# Altium PCB Quadro.PcbDoc (part 1 of 2)
Units mm, origin at the board's own origin, x right, y up, seen from the top; angles counter-clockwise.
Board outline 388.52 x 333.5 mm, 2 copper layers (Top Layer, Bottom Layer); 70 components, 65 nets, 291 pads, 66 vias.
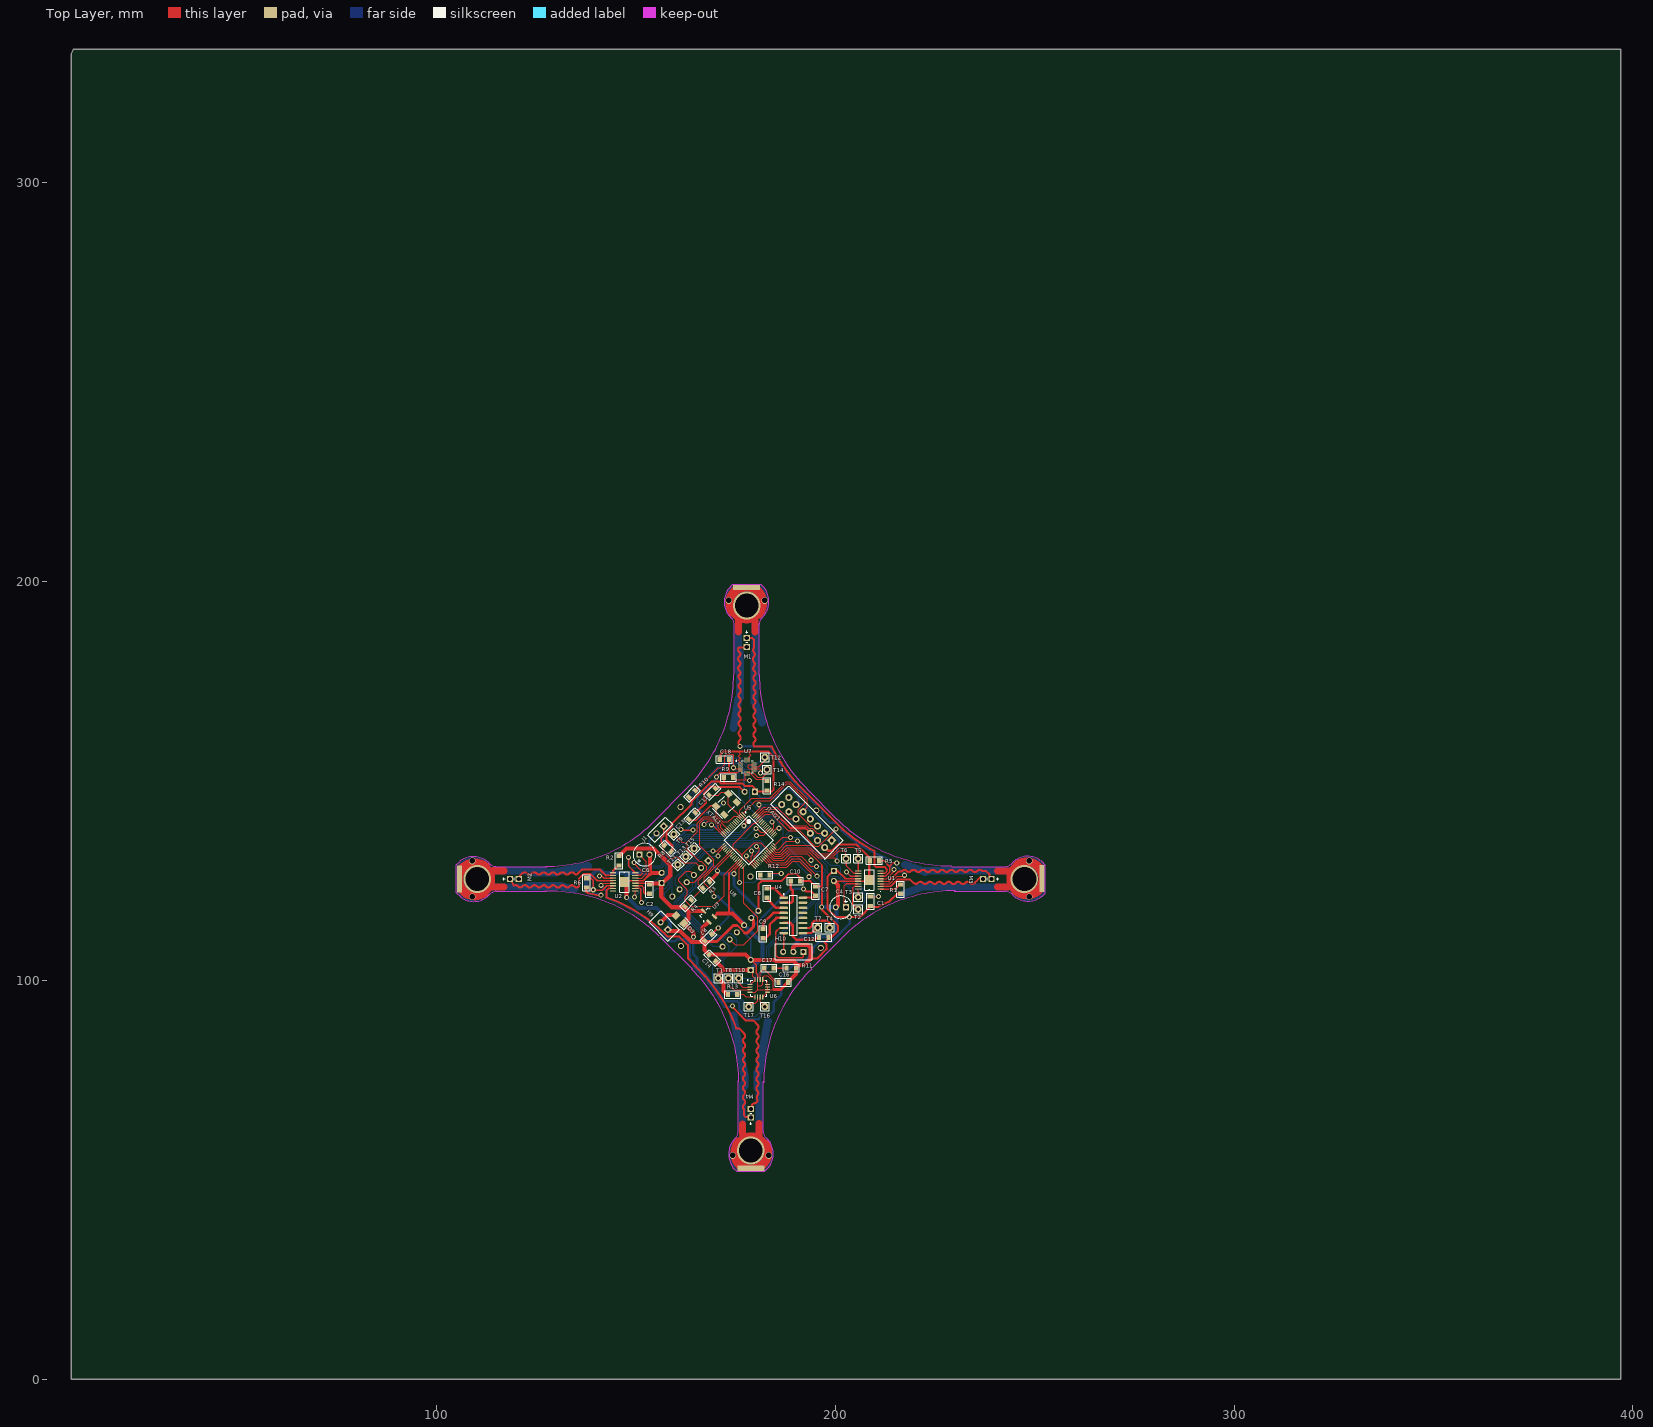
[diagram p0: Top Layer view]
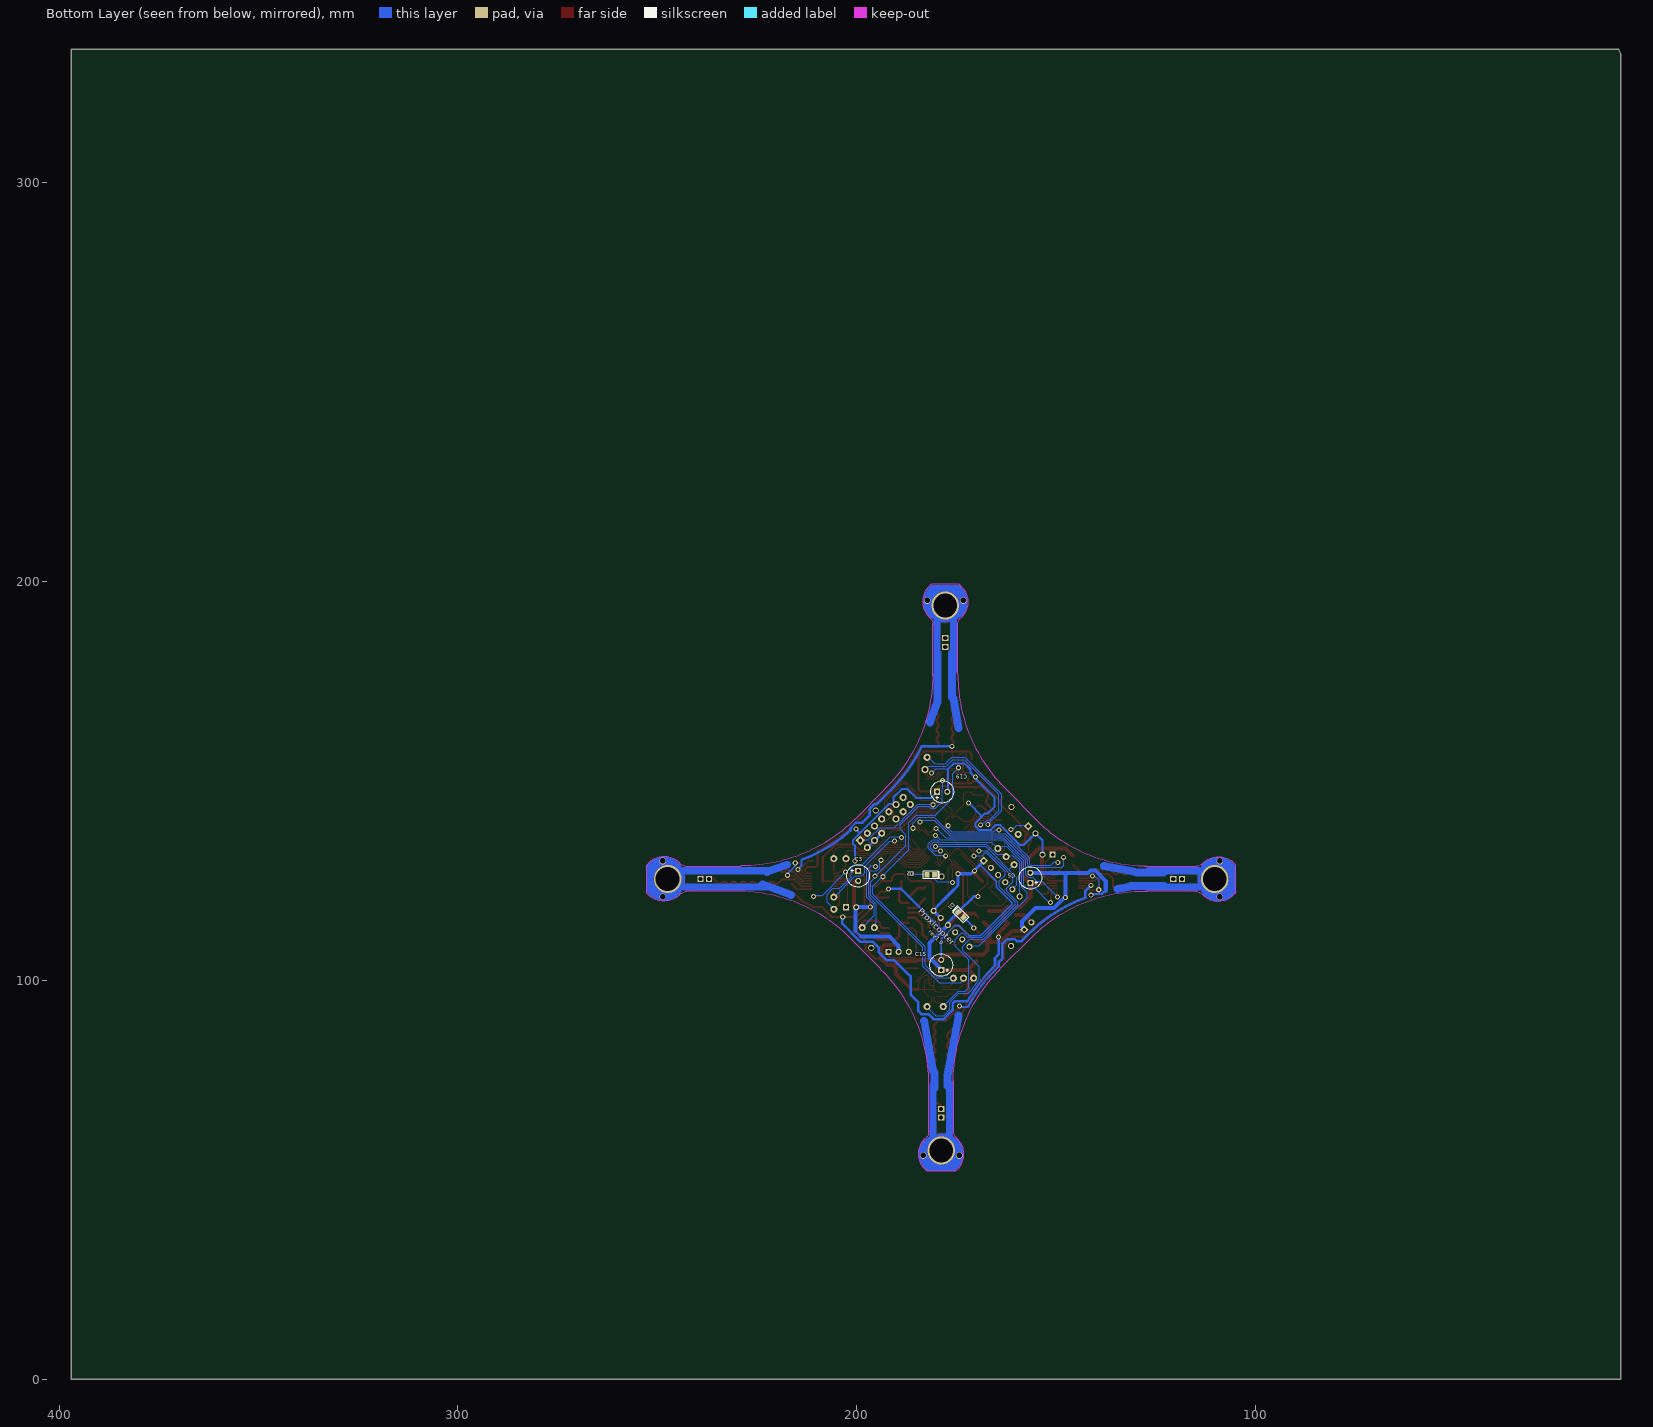
[diagram p1: Bottom Layer view, seen from below]

## Layer stack, top to bottom
Top Layer: signal copper 0.0356
Dielectric: dielectric 0.32, FR-4, Dk 4.8
Bottom Layer: signal copper 0.0356

## Board outline
8.992,333.502 396.951,333.502 396.951,0 8.433,0 8.433,332.384

## Design rules (kind name [scope] priority, off if disabled: settings)
Clearance [All] p1: gap=0.203
HoleSize [All] p1: absolutevalues=TRUE maxlimit=15.24 minlimit=0.025 maxpercent=80.000 minpercent=20.000
MinimumSolderMaskSliver [All] p1: minsoldermaskwidth=0.127
PolygonConnect [All] p1: connectstyle=Relief reliefconductorwidth=0.254 reliefentries=4 polygonreliefangle="90 Angle"
RoutingVias [All] p1: holewidth=0.711 width=1.27 viastyle="Through Hole" minholewidth=0.711 minwidth=1.27 maxholewidth=0.711 maxwidth=1.27
SilkToSilkClearance [All] p1: silktosilkclearance=0.203
SilkscreenOverComponentPads [All] p1: minsilkscreentomaskgap=0.254
SolderMaskExpansion [All] p1: expansion=0.051
Width [All] p1: maxlimit=4 minlimit=0.254 preferedwidth=0.254
24 further rules are at their usual default settings.

## Components (designator, comment, footprint, x,y, rotation, side; value= is the part's Value field where it differs from the comment)
C1 "" C0805 208.788,119.888 r90 top
C2 "" C0805 153.416,122.936 r270 top
C3 "10uF" CAP 199.644,127.508 r180 bottom
C4 "2.2uF" CAP 202.692,118.364 r270 top
C5 "10uF" CAP 156.464,124.46 r0 bottom
C6 "2.2uF" CAP 150.876,131.572 r90 top
C7 "" C0805 195.072,122.428 r90 top
C8 "" C0805 182.88,121.92 r90 top
C9 "" C0805 181.864,111.76 r90 top
C10 "" C0805 189.992,124.968 r180 top
C11 "" C0805 169.164,147.32 r225 top
C12 "" C0805 197.104,110.744 r0 top
C13 "" C0805 164.084,141.224 r225 top
C14 "" C0805 169.164,105.664 r135 top
C15 "10uF" CAP 178.816,102.616 r0 bottom
C16 "" C0805 186.944,99.568 r0 top
C17 "" C0805 183.388,103.124 r180 top
C18 "" C0805 172.212,155.448 r180 top
C19 "10uF" CAP 179.832,147.32 r90 bottom
D1 "DIODE1" LED0805 173.228,115.824 r45 bottom
D2 "DIODE1" LED0805 182.372,126.492 r180 bottom
D3 "DIODE" D1206 161.036,115.316 r135 top
H9 "HEADER_2X1" HDR2X1 157.988,112.776 r225 top
H10 "HEADER_3X1" HDR3X1 192.024,107.188 r270 top
J1 "JMP" DIODE 156.972,138.684 r315 top
JTAG1 "JTAG-USBTAP" USB-TAP 199.136,135.128 r135 top
M1 "Motor" GDC612 177.8,194.056 r0 top
M2 "Motor" GDC612 110.236,125.476 r90 top
M3 "Motor" GDC612 247.396,125.476 r270 top
M4 "Motor" GDC612 178.816,57.404 r180 top
R1 "" R0805 216.408,122.936 r270 top
R2 "" R0805 145.796,130.048 r90 top
R3 "" R0805 167.64,123.952 r225 top
R4 "" R0805 163.068,119.38 r225 top
R5 "" R0805 209.804,130.048 r0 top
R6 "" R0805 137.668,124.46 r90 top
R7 "" R0805 168.148,110.744 r225 top
R8 "" R0805 157.988,133.096 r315 top
R9 "" R0805 173.228,150.876 r180 top
R10 "" R0805 164.084,146.812 r225 top
R11 "" R0805 188.976,103.124 r0 top
R12 "" R0805 182.372,126.492 r180 top
R13 "" R0805 174.244,96.52 r180 top
R14 "" R0805 182.88,148.844 r270 top
T1 "TestPoint" HDR1X1 170.688,100.584 r0 top
T2 "TestPoint" HDR1X1 205.74,117.856 r270 top
T3 "TestPoint" HDR1X1 205.74,120.904 r90 top
T4 "TestPoint" HDR1X1 198.628,113.284 r0 top
T5 "TestPoint" HDR1X1 205.74,130.556 r0 top
T6 "TestPoint" HDR1X1 202.692,130.556 r90 top
T7 "TestPoint" HDR1X1 195.58,113.284 r0 top
T8 "TestPoint" HDR1X1 173.228,100.584 r0 top
T9 "TestPoint" HDR1X1 159.512,136.652 r45 top
T10 "TestPoint" HDR1X1 175.768,100.584 r90 top
T11 "TestPoint" HDR1X1 160.528,129.032 r135 top
T12 "TestPoint" HDR1X1 182.372,155.956 r90 top
T13 "TestPoint" HDR1X1 162.56,131.064 r225 top
T14 "TestPoint" HDR1X1 182.88,152.908 r90 top
T15 "TestPoint" HDR1X1 164.592,133.096 r135 top
T16 "TestPoint" HDR1X1 182.372,93.472 r90 top
T17 "TestPoint" HDR1X1 178.308,93.472 r90 top
U1 "DRV8833" R_PDSO_G16 211.328,122.936 r180 top
U2 "DRV8833" R_PDSO_G16 144.272,127 r0 top
U3 "MCP1700" SOT-23_M 167.627,116.741 r135 top
U4 "MAX3232CSE" NSO16_N 189.484,116.332 r0 top
U5 "MC56F8257" LQFP64 178.308,135.128 r315 top
U6 "L3G4200D" LGA16-A 180.848,98.044 r0 top
U7 "LIS3DH" LGA-16 177.927,153.594 r0 top
U8 "MRF24J40MA" MRF24J40MA 168.148,130.048 r315 top
XTAL1 "XTAL" OSC_SMD_CRYS 173.228,146.812 r225 top

## Footprints (in the part's own frame and the unit in brackets; to place one, negate y for a bottom-side part, rotate by r counter-clockwise, add the part's x,y. Pads: shape width x height; smd on the part's side, far side on the other; paste and mask are expansions set on the pad)
C0805 [mm]
  rect 1.05x1.3 smd: 1(-1.175,0) 2(1.175,0)
  silkscreen extent -2,-0.95 2,0.95, body extent -1,-0.63 1,0.63, height 0.9
CAP [mil]
  rect 60x60 hole 35.43: 1(0,0)
  round 60 hole 35.43: 2(0,-100)
  silkscreen extent -112,-162 112,62
D1206 [mil]
  rect 63x70 smd: 1(-55,0) 2(55,0)
  silkscreen extent -98,-47 -20,47
DIODE [mil]
  rect 60x60 hole 35.43: 1(0,0)
  round 60 hole 35.43: 2(0,-100)
  silkscreen extent -50,-175 50,75
GDC612 [mm] "GDC612"
  rect 6.75x1.3 smd: 0(-0.05,4.475)
  rect 1.524x1.524 hole 1.016: 1(0,-8.2) 2(0,-10.4)
  Top Layer circle w1.524: c-0.065,0.275 r4.015
  Top Layer lines w0.762: -3.975,-2.375 cw(c-0.125,0.6) -3.1,4.45 ; 3.025,4.475 cw(c-0.462,0.637) 3.375,-2.85
  Top Layer lines w1.778: -2.025,-6.7 -2.025,-3.85 ; 2.05,-6.65 2.05,-3.975
  Bottom Layer lines w0.381: -3.325,4.2 3.55,4.2
  Bottom Layer lines w0.762: -4.525,-1.55 -4.525,1.3 ; -0.725,-3.914 0.925,-3.925
  Bottom Layer lines w1: -3.85,4.025 -3.275,4.6 -3.25,4.6 ; -3.25,4.65 3.15,4.65 ; 3.325,4.45 3.425,4.45 4,3.875
  Bottom Layer lines w1.27: -4.025,0 cw(c-0.238,0.238) -0.475,4.025 ; 0.325,4.15 cw(c0,0.225) 3.925,-0.1
  Bottom Layer lines w1.778: -3.3,3.95 ccw(c-0.75,0.875) -0.895,-3.117 ; -2.05,-16.525 -2.05,-3.925 ; 1.408,-3.162 ccw(c0.525,0.875) 3.2,4.025 ; 2.05,-16.575 2.05,-4
  Keep-Out Layer lines w0.254: -4.525,4.2 -3.475,5.25 3.55,5.25 4.35,4.45 4.35,4.4 ; -4.5,4.225 ccw(c-0.325,0.875) -3.675,-3.3 ; -3.711,-3.253 cw(c-5.783,-4.979) -3.099,-4.723 ; -3.1,-17.275 -3.1,-4.6 ; 3.1,-17.5 3.1,-4.6 ; 3.119,-4.672 cw(c5.804,-4.918) 3.725,-3.2 ; 3.589,-3.312 ccw(c-0.012,0.962) 4.375,4.425
  silkscreen extent -0.3,-9.3 0.3,-6.4
HDR1X1 [mil]
  round 70 hole 35: 1(0,0)
  silkscreen extent -43,-43 43,43
HDR2X1 [mil]
  rect 60x60 hole 35.43: 1(0,0)
  round 60 hole 35.43: 2(0,-100)
  silkscreen extent -80,-180 80,80
HDR3X1 [mil]
  rect 60x60 hole 35.43: 1(0,0)
  round 60 hole 35.43: 2(0,-100) 3(0,-200)
  silkscreen extent -81,-280 80,80
LED0805 [mil]
  rect 51x55 smd: 1(0,0) 2(75,0)
  silkscreen extent -36,-37 122,37, body extent -20,-57 95,57, height 33
LGA16-A [mm] "QFN, 16-Leads, Body 4,0x4,0mm (max), Pitch 0,50mm, IPC Medium Density"
  rect 1.3x0.3 smd: 1(-2.2,0.975)
  oval 1.3x0.3 smd: 2(-2.2,0.325) 3(-2.2,-0.325) 4(-2.2,-0.975) 9(2.2,-0.975) 10(2.2,-0.325) 11(2.2,0.325) 12(2.2,0.975)
  oval 0.3x1.3 smd: 5(-0.975,-2.2) 6(-0.325,-2.2) 7(0.325,-2.2) 8(0.975,-2.2) 13(0.975,2.2) 14(0.325,2.2) 15(-0.325,2.2) 16(-0.975,2.2)
  silkscreen extent -2.9,-2 2,2.17
LGA-16 [mm]
  rect 1.3x0.25 smd: 1(-1.7,1)
  oval 1.3x0.25 smd: 2(-1.7,0.5) 3(-1.7,0) 4(-1.7,-0.5) 5(-1.7,-1) 9(1.7,-1) 10(1.7,-0.5) 11(1.7,0) 12(1.7,0.5) 13(1.7,1)
  oval 0.25x1.3 smd: 6(-0.5,-1.7) 7(0,-1.7) 8(0.5,-1.7) 14(0.5,1.725) 15(0,1.725) 16(-0.5,1.725)
  silkscreen extent -2.82,-1.53 1.5,1.57, body extent -1.5,-1.5 1.5,1.5, height 1
LQFP64 [mm] "Thin QFP, 64-Leads, Body 10x10mm, Pitch 0.5mm, IPC High Density"
  oval 1.55x0.25 smd: 1(-5.525,3.75) 2(-5.525,3.25) 3(-5.525,2.75) 4(-5.525,2.25) 5(-5.525,1.75) 6(-5.525,1.25) 7(-5.525,0.75) 8(-5.525,0.25) 9(-5.525,-0.25) 10(-5.525,-0.75) 11(-5.525,-1.25) 12(-5.525,-1.75) 13(-5.525,-2.25) 14(-5.525,-2.75) 15(-5.525,-3.25) 16(-5.525,-3.75) 33(5.525,-3.75) 34(5.525,-3.25) 35(5.525,-2.75) 36(5.525,-2.25) 37(5.525,-1.75) 38(5.525,-1.25) 39(5.525,-0.75) 40(5.525,-0.25) 41(5.525,0.25) 42(5.525,0.75) 43(5.525,1.25) 44(5.525,1.75) 45(5.525,2.25) 46(5.525,2.75) 47(5.525,3.25) 48(5.525,3.75)
  oval 0.25x1.55 smd: 17(-3.75,-5.525) 18(-3.25,-5.525) 19(-2.75,-5.525) 20(-2.25,-5.525) 21(-1.75,-5.525) 22(-1.25,-5.525) 23(-0.75,-5.525) 24(-0.25,-5.525) 25(0.25,-5.525) 26(0.75,-5.525) 27(1.25,-5.525) 28(1.75,-5.525) 29(2.25,-5.525) 30(2.75,-5.525) 31(3.25,-5.525) 32(3.75,-5.525) 49(3.75,5.525) 50(3.25,5.525) 51(2.75,5.525) 52(2.25,5.525) 53(1.75,5.525) 54(1.25,5.525) 55(0.75,5.525) 56(0.25,5.525) 57(-0.25,5.525) 58(-0.75,5.525) 59(-1.25,5.525) 60(-1.75,5.525) 61(-2.25,5.525) 62(-2.75,5.525) 63(-3.25,5.525) 64(-3.75,5.525)
  silkscreen extent -5.65,-4.35 4.35,4.55, body extent -9.88,-9.88 9.88,9.88, height 1.6
MRF24J40MA [mil]
  rect 60x60 hole 35: 1(0,0)
  round 60 hole 35: 2(0,-100) 3(0,-200) 4(0,-300) 5(0,-400) 6(0,-500) 7(700,-500) 8(700,-400) 9(700,-300) 10(700,-200) 11(700,-100) 12(700,0)
NSO16_N [mm] "SOIC, 16-Leads, Body 9.9x3.9mm, Pitch 1.27mm, IPC Medium Density"
  oval 2.2x0.6 smd: 1(-2.4,4.445) 2(-2.4,3.175) 3(-2.4,1.905) 4(-2.4,0.635) 5(-2.4,-0.635) 6(-2.4,-1.905) 7(-2.4,-3.175) 8(-2.4,-4.445) 9(2.4,-4.445) 10(2.4,-3.175) 11(2.4,-1.905) 12(2.4,-0.635) 13(2.4,0.635) 14(2.4,1.905) 15(2.4,3.175) 16(2.4,4.445)
  silkscreen extent -2.52,-5 0.9,5.42, body extent -2,-5 2,5, height 1.75
OSC_SMD_CRYS [mm]
  rect 1.4x1.7 smd: 1(0,0) 2(4.425,0) 3(4.425,2.95) 4(0,2.95)
  silkscreen extent -1,-0.38 5.43,3.32
R0805 [mm]
  rect 1.05x1.3 smd: 1(-1.175,0) 2(1.175,0)
  silkscreen extent -2,-0.95 2,0.95, body extent -1,-0.63 1,0.63, height 0.5
R_PDSO_G16 [mm]
  rect 1.6x0.3 smd: 1(0,0)
  oval 1.6x0.3 smd: 2(0,-0.65) 3(0,-1.3) 4(0,-1.95) 5(0,-2.6) 6(0,-3.25) 7(0,-3.9) 8(0,-4.55) 9(5.6,-4.55) 10(5.6,-3.9) 11(5.6,-3.25) 12(5.6,-2.6) 13(5.6,-1.95) 14(5.6,-1.3) 15(5.6,-0.65) 16(5.6,0)
  rect 2.5x2.5 smd: 17(2.794,-2.286)
  silkscreen extent -0.03,-4.88 3.97,0.64
SOT-23_M [mm] "SOT23, 3-Leads, Body 3.0x2.6mm (max), Pitch 0.95mm, IPC Medium Density"
  rect 1.6x0.6 smd: 1(-1.95,0.95) 2(-1.95,-0.95) 3(0.9,0)
  silkscreen extent -1.02,-1.5 0.7,1.92, body extent -0.7,-1.52 0.7,1.53, height 1.12
USB-TAP [mil]
  rect 70x70 hole 37: 1(0,0)
  round 70 hole 37: 2(0,100) 3(100,0) 4(100,100) 5(200,0) 6(200,100) 7(300,0) 9(400,0) 10(400,100) 11(500,0) 12(500,100) 13(600,0) 14(600,100)
  silkscreen extent -80,-80 680,180

## Part data
C1 C2 C7 C8 C9 C10 C11 C12 C13 C14 C16 C17 C18: library part CAP1, "Capacitor"
C3 C4 C5 C6 C15 C19: library part CAP2, "Polarized capacitor"
D1 D2: "Typical INFRARED GaAs LED"
D3: "Diode"
H9: "Header 2x1"
H10: "Header 3x1"
JTAG1: "JTAG connector to Freescale's USB-TAP"
M1 M2 M3 M4: library part MOTOR
R1 R2 R3 R4 R5 R6 R7 R8 R9 R10 R11 R12 R13 R14: library part RES, "Resistor"
T1 T2 T3 T4 T5 T6 T7 T8 T9 T10 T11 T12 T13 T14 T15 T16 T17: library part TEST, "Test signal"
U1 U2: "Dual H-Bridge Motor Driver"
U3: "Linear voltage requaltor by MicroChip"
U4: "3.0V TO 5.5V, Low-Power, up to 1Mbps, True RS-232 Transceiver Using Four 0.1µF External Capacitor"
U6: "3-axis gyro by ST"
U7: "3-Axis Accelerometer by ST"
U8: "MRF24J40MA tranceiver board"

## Free pads (board coordinates)
  round 1.524 hole 1.016: 0(161.238,143.502) 0(161.291,108.695) 0(178.739,126.072) 0(195.232,142.636) 0(196.364,108.2)

## Via types
v1: diameter 1.27, hole 0.711, Top Layer to Bottom Layer, 54 vias
v2: diameter 1.7, hole 1.4, Top Layer to Bottom Layer, 8 vias
v3: diameter 7, hole 6, Top Layer to Bottom Layer, 4 vias

## Nets (pads, with @x,y where several pads share a name; then routed paths per layer and width w, separated by ;. In a path a pad name is that pad's centre, name@x,y a point inside that pad or via, vN(x,y) a via of type N, cw(c..) or ccw(c..) an arc to the next point about the centre after c; other vN are vias at no path point)
AINT1: T12.1 U5.15 U7.11 | length 44.6
  Top Layer w0.254: v1(167.132,139.09) 168.123,140.081 169.429,140.081 170.713,138.797 170.713,138.176 ; 170.739,138.303 170.739,138.101 U5.15@172.103,136.737 ; U7.11@179.327,153.594 180.797,153.594 182.423,155.219 T12.1@182.423,155.854
  Bottom Layer w0.305: v1@167.157,139.141 163.678,142.621 163.678,146.691 172.803,155.816 176.272,155.816 177.91,154.178 180.264,154.178 182.169,156.083 T12.1@182.321,156.083
AINT2: T14.1 U5.16 U7.9 | length 42.9
  Top Layer w0.254: v1@169.103,139.03 U5.16@171.75,136.383
  Top Layer w0.305: U7.9@179.327,152.527 179.327,152.168 180.543,150.952 181.813,150.952 183.058,152.197 T14.1@182.347,152.908
  Bottom Layer w0.305: v1@169.037,139.065 169.113,139.141 168.482,139.141 167.542,140.081 166.936,140.081 164.44,142.577 164.44,146.734 172.963,155.257 176.041,155.257 177.679,153.619 182.016,153.619 T14.1@182.677,152.959
  other v1: 168.986,139.04
BATT: R3.2 R4.1 U5.14 | length 32.6
  Top Layer w0.254: R4.1@163.83,120.244 R3.2@166.726,123.139 ; R3.2@166.7,123.241 166.564,123.241 165.675,124.13 165.675,124.977 168.003,127.305 168.021,127.305 169.556,128.84 169.556,130.185 ; 169.342,140.589 167.157,140.589 165.964,139.395 165.964,133.833 169.545,130.251 ; 169.393,140.589 169.639,140.589 171.298,138.931 171.298,138.249 U5.14@172.457,137.09
GINT1: T16.1 U5.17 U6.7 | length 73.8
  Top Layer w0.254: v1@169.316,132.461 v1(169.342,132.461) 170.338,132.461 U5.17@171.75,133.873 U5.17@171.328,133.452 ; U6.7@181.173,95.844 181.173,94.62 T16.1@182.372,93.421
  Bottom Layer w0.254: 169.304,103.441 171.907,106.045 ; 169.342,103.454 169.264,103.376 169.264,100.324 cw(c138.221,75.13) 171.333,97.535 ; v1(169.342,132.461) 167.215,132.461 162.384,127.63 162.384,127.602 161.983,127.201 161.956,127.201 160.849,126.095 160.849,124.748 162.422,123.175 162.422,122.417 159.681,119.676 159.681,118.99 168.409,110.261 171.755,110.261 173.406,108.61 173.406,107.493 171.933,106.02 ; 171.283,97.522 172.184,96.622 174.521,96.622 176.644,94.498 176.644,92.773 178.359,91.059 180.111,91.059 182.296,93.243 T16.1@182.296,93.345
GINT2: T17.1 U5.18 U6.6 | length 68.6
  Top Layer w0.254: v1@170.637,131.394 170.637,132.053 U5.18@172.103,133.519 ; T17.1@178.13,94.031 T17.1@178.41,94.031 ; T17.1@178.283,93.421 178.283,93.624 178.994,94.336 179.908,94.336 180.523,94.95 U6.6@180.523,95.844 ; T17.1@178.333,93.955 T17.1@178.41,94.031 ; T17.1@178.587,94.031 T17.1@178.41,94.031
  Bottom Layer w0.254: v1(170.586,131.191) 168.681,131.191 168.021,131.851 167.351,131.851 162.822,127.322 162.822,126.408 164.236,124.993 164.236,123.513 160.29,119.567 160.29,119.099 168.632,110.757 172.174,110.757 173.101,111.684 173.101,111.735 173.253,111.887 173.838,111.887 175.336,110.388 175.336,108.56 171.958,105.181 171.958,100.007 171.907,99.956 171.907,98.146 172.923,97.13 174.731,97.13 177.754,94.107 T17.1@177.978,94.107
GND: C3.2 C4.2 C5.2 C6.2 C7.2 C10.1 C11.1 C12.2 C13.1 C14.2 C15.2 C16.2 C18.1 C19.2 H9.1 H10.2 J1.2 JTAG1.2 JTAG1.4 JTAG1.6 R3.1 R5.1 R6.1 R7.2 R11.2 R12.2 U1.13 U1.17 U2.13 U2.17 U3.1 U5.23 U5.30 U5.43 U5.61 U6.4 U6.8 U6.9 U6.10 U6.11 U6.12 U6.13 U6.15 U7.5 U7.10 U7.12 U8.1 U8.11 U8.12 | length 508.9
  Top Layer w0.254: v1@170.485,127.559 170.485,128.365 U5.23@173.871,131.752 ; v1@174.944,127.09 174.944,127.875 U5.30@176.346,129.277 ; 175.463,152.044 176.013,152.594 U7.5@176.527,152.594 ; 178.384,154.102 178.359,154.102 178.206,153.949 178.206,153.314 178.427,153.094 U7.10@179.327,153.094 ; 178.494,154.094 U7.12@179.327,154.094 ; U6.4@178.74,97.079 179.934,97.079 180.518,97.663 ; U8.11@178.918,115.722 178.918,115.875 U8.11@178.943,115.9 ; U7.10@179.627,153.094 180.967,153.094 181.254,152.806 v1@181.254,152.019 ; 180.492,98.704 180.518,98.704 ; 180.492,101.498 180.518,101.498 ; 180.518,97.688 180.518,98.704 ; U6.15@180.518,100.051 180.518,98.704 ; U6.15@180.518,100.711 U6.15@180.543,100.686 ; 180.548,97.719 U6.10@183.032,97.719 ; U5.61@180.624,140.626 182.314,142.316 182.423,142.316 ; R12.2@180.975,126.492 180.975,125.578 181.534,125.019 ; U6.8@181.823,95.844 182.982,97.003 182.982,97.638 U6.10@183.032,97.688 ; U6.13@181.864,100.127 181.94,100.051 182.702,100.051 182.982,99.771 182.982,98.4 183.032,98.349 U6.10@183.032,97.719 ; U6.10@183.032,97.714 U6.10@183.032,97.719 ; U6.10@183.048,97.719 U6.10@183.032,97.719 ; 184.455,97.79 184.455,99.797 183.058,101.194 182.169,101.194 181.823,100.848 U6.13@181.823,100.244 181.823,99.07 181.458,98.704 180.518,98.704 ; JTAG1.6@193.624,137.033 JTAG1.6@193.624,137.109 ; JTAG1.4@195.58,135.153 JTAG1.4@195.605,135.153 ; 196.672,128.956 196.672,128.981
  Top Layer w0.305: U2.17@147.45,125 U2.17@147.5,125.05 ; C6.2@153.4,131.575 C6.2@153.55,131.425 ; C15.2@178.41,105.562 C15.2@178.816,105.156 ; U6.10@183.048,97.714 184.633,97.714 ; U5.43@183.099,132.105 184.572,130.632 186.741,130.632 188.417,132.309 193.345,132.309 196.672,128.981
  Top Layer w0.356: 182.423,142.316 184.633,142.316 184.836,142.113
  Top Layer w0.381: v1@141.236,121.21 v1@141.247,121.208 ; U2.17@147.5,125.05 U2.13@149.872,125.05 151.898,125.05 ; C11.1@170.104,148.133 170.459,148.488 ; v1@170.282,150.597 170.282,151.257 171.069,152.044 175.463,152.044 ; C15.2@178.841,105.181 178.867,105.156 180.162,103.861 180.162,101.829 180.492,101.498 ; U8.11@178.918,115.722 179.502,115.138 ; U6.15@180.518,100.711 180.518,101.498 ; 196.647,123.596 196.672,123.622 196.672,128.956 ; C3.2@199.796,125.044 199.955,124.886 U1.13@205.728,124.886 208.02,124.886 U1.17@208.051,124.917 ; C4.2@200.177,118.339 C4.2@200.66,118.821
  Top Layer w0.508: 137.617,122.257 137.946,121.928 v1@141.236,121.21 ; 151.898,125.05 153.55,126.702 ; C13.1@165.024,142.037 167.615,144.628 167.615,145.11 167.045,145.68 167.045,146.827 168.808,148.59 169.723,148.59 C11.1@170.002,148.311 ; 170.361,109.756 170.434,109.83 ; v1@170.459,127.559 v1(170.51,127.508) ; 170.459,148.488 176.073,148.488 C19.2@177.19,147.371 ; 173.355,152.146 173.355,155.416 C18.1@173.387,155.448 ; 175.398,113.817 177.253,111.963 ; U8.12@180.72,117.476 180.72,124.129 181.508,124.917 186.487,124.917 188.239,126.67 190.373,126.67 191.135,125.908 C10.1@191.135,124.968 ; 184.836,142.113 184.861,142.113 188.798,138.176 192.557,138.176 JTAG1.6@193.624,137.109 ; H10.2@189.484,107.188 H10.2@189.484,107.315 ; C10.1@191.211,124.943 192.918,124.943 192.943,124.917 193.758,124.917 C7.2@195.072,123.603 ; 193.853,105.562 195.555,105.562 197.917,107.925 197.764,108.077 197.764,109.093 197.485,109.372 ; C7.2@195.072,123.825 195.275,123.622 196.596,123.622 196.672,123.546 196.672,117.78 200.711,113.741 200.711,112.471 199.06,110.82 198.349,110.82 C12.2@198.323,110.795 ; 197.333,109.474 198.425,110.566 C12.2@198.425,110.744 ; 199.161,132.486 200.787,134.112 205.257,134.112 208.509,130.861
  Top Layer w0.635: 137.617,122.257 R6.1@137.617,123.266 ; JTAG1.2@197.637,133.198 198.247,132.588 199.232,132.588 ; U1.17@208.509,124.866 208.509,130.861
  Top Layer w0.762: R7.2@167.16,109.756 170.361,109.756 ; R3.1@168.504,124.892 v1@170.51,126.898 ; 170.459,109.88 174.396,113.817 175.398,113.817 ; 177.253,111.963 177.978,111.963 179.502,113.487 179.502,115.138 ; 184.633,97.714 186.265,97.714 C16.2@188.119,99.568
  Top Layer w1.016: U2.17@147.472,124.612 147.701,124.384 v1(147.701,120.777) ; 153.55,126.702 C6.2@153.55,131.425 ; 153.55,126.975 C5.2@156.475,126.975 ; H9.1@158.064,112.42 161.112,112.42 163.906,109.626 ; 163.907,109.626 163.933,109.601 165.048,109.601 165.073,109.626 166.395,109.626 ; U3.1@168.034,114.592 166.751,113.309 166.751,110.165 167.16,109.756 167.16,107.617 C14.2@168.313,106.464 ; C14.2@168.333,106.495 177.477,106.495 C15.2@178.74,105.232 ; C15.2@178.816,105.156 178.867,105.156 184.881,105.156 185.186,104.851 189.586,104.851 190.576,103.861 ; C16.2@188.163,99.593 190.151,101.581 R11.2@190.151,103.124 190.938,103.911 192.202,103.911 193.853,105.562 193.853,108.128 193.04,108.941 190.144,108.941 189.433,108.229 ; H10.2@189.459,107.188 189.459,108.204 ; C3.2@199.72,124.917 200.66,123.977 C4.2@200.66,118.821
  Bottom Layer w0.254: JTAG1.6@193.748,136.833 JTAG1.6@193.748,136.924
  Bottom Layer w0.305: 177.165,152.933 180.188,152.933 v1@181.178,151.943 ; JTAG1.2@197.256,133.375 JTAG1.2@197.256,133.415
  Bottom Layer w0.381: v1@141.199,121.463 v1@141.249,121.412 ; 169.113,129.057 169.113,129.007 164.998,124.892 164.998,123.419 160.985,119.405 160.985,119.202 168.91,111.277 171.882,111.277 174.142,113.538 ; 174.168,113.538 174.32,113.69 175.489,113.69 178.816,110.363 C15.2@178.816,105.156 ; 177.14,152.933 177.165,152.933 ; U8.11@178.924,115.68 U8.11@178.951,115.68
  Bottom Layer w0.508: 137.566,122.504 137.71,122.504 137.77,122.504 ; 138.608,121.666 140.778,121.666 141.154,121.291 v1@141.224,121.361 ; C6.2@153.416,131.572 153.416,135.179 J1.2@155.067,136.83 ; J1.2@155.176,136.888 158.082,133.982 159.083,133.982 163.043,137.942 ; 163.032,138.008 163.987,138.963 165.202,138.963 166.37,137.795 169.393,137.795 170.205,138.608 170.205,139.548 167.843,141.91 167.081,141.91 165.43,143.561 165.43,145.847 v1@170.231,150.647 ; 168.631,141.224 171.933,144.526 v1(172.009,144.526) ; v1@170.282,150.876 171.475,152.07 171.475,152.908 173.025,154.457 175.616,154.457 177.14,152.933 ; 176.53,121.895 176.555,121.895 ; C19.2@177.165,147.32 177.165,152.933 ; U8.12@180.67,117.551 180.772,117.653 U8.12@180.772,117.678 ; 198.929,111.049 200.279,112.398 ; C4.2@200.152,118.44 C4.2@200.228,118.364
  Bottom Layer w0.635: 137.71,122.504 138.451,121.763 ; JTAG1.6@193.748,136.833 JTAG1.4@195.478,135.103 ; JTAG1.4@195.544,135.128 JTAG1.2@197.256,133.415
  Bottom Layer w0.762: U8.1@168.11,130.01 169.113,129.007 171.348,126.771 v1(174.6,126.771) 174.6,123.825 176.53,121.895 ; 176.555,121.895 U8.12@180.772,117.678 ; U8.11@178.951,115.68 U8.12@180.67,117.399
  Bottom Layer w1.016: 137.566,122.504 137.566,124.943 140.157,127.533 141.426,127.533 141.984,126.975 147.599,126.975 147.599,121.031 150.495,118.135 155.169,118.135 158.547,114.757 158.547,113.386 H9.1@157.963,112.801 ; 148.361,126.975 C5.2@156.425,126.975 ; H10.2@189.484,107.188 189.484,108.712 191.821,111.049 198.929,111.049 ; v1(196.596,118.44) C4.2@200.152,118.44 ; 200.279,112.398 C4.2@200.279,118.313
  other v1: 141.275,121.387 170.256,151.054 181.254,151.994
MISO: T15.1 U5.33 U8.7 | length 64.9
  Top Layer w0.254: v1(177.698,131.267) 177.698,130.429 177.902,130.226 ; 177.902,130.231 U5.33@179.563,128.57
  Bottom Layer w0.254: U8.7@171.653,108.585 169.367,108.585 157.201,120.752 157.201,121.996 158.623,123.419 158.623,129.718 158.674,129.769 158.674,129.801 160.626,131.753 160.659,131.753 162.433,133.528 165.049,133.528 166.091,134.569 179.074,134.569 179.709,135.204 181.077,135.204 182.016,134.264 182.016,133.172 181.966,133.121 181.966,133.013 180.22,131.267 v1(177.698,131.267)
MOSI: T11.1 U5.35 U8.5 | length 34.2
  Top Layer w0.254: U5.35@180.27,129.277 179.654,129.893 179.654,131.089 180.975,132.41 180.975,132.994 v1@180.416,133.553
  Bottom Layer w0.254: T11.1@160.528,129.032 161.823,127.762 ; U8.5@160.884,122.987 159.842,124.028 159.842,125.806 167.564,133.528 180.188,133.528 v1(180.264,133.604) v1@180.264,133.782
NetC1_2: C1.2 U1.11 | length 15.8
  Top Layer w0.305: C1.2@208.788,121.063 v1@210.813,121.063
  Top Layer w0.381: v1(202.819,127.178) 203.811,126.186 U1.11@205.728,126.186
  Bottom Layer w0.254: v1(202.819,127.178) 208.686,121.31 210.668,121.31 v1@210.82,121.158
  other v1: 210.845,121.031
NetC2_2: C2.2 U2.11 | length 5.1
  Top Layer w0.381: U2.11@149.872,123.75 151.525,123.75 151.943,123.332 151.943,122.022 ; 151.968,122.022 152.273,121.717 C2.2@153.416,121.717
NetC4_1: C4.1 U1.14 | length 9.2
  Top Layer w0.305: C4.1@202.717,118.364 202.286,118.796 202.286,123.749 202.773,124.236
  Top Layer w0.381: 202.773,124.236 U1.14@205.728,124.236
NetC6_1: C6.1 U2.14 | length 8.4
  Top Layer w0.254: C6.1@150.876,131.572 152.625,129.823 152.625,126.804 151.496,125.675
  Top Layer w0.305: U2.14@150.175,125.675 151.496,125.675
NetC8_1: C8.1 U4.3 | length 5.1
  Top Layer w0.635: C8.1@182.88,120.523 185.191,118.212 ; 185.268,118.237 U4.3@187.084,118.237
NetC8_2: C8.2 U4.1 | length 5
  Top Layer w0.635: C8.2@182.88,123.317 183.109,123.088 184.76,123.088 U4.1@186.919,120.929
NetC9_1: C9.1 U4.5 | length 8.2
  Top Layer w0.635: C9.1@182.397,110.49 183.566,111.658 183.566,114.021 185.242,115.697 U4.5@187.084,115.697
NetC9_2: C9.2 U4.4 | length 7.4
  Top Layer w0.635: C9.2@181.915,113.233 181.915,114.402 184.48,116.967 U4.4@187.084,116.967
NetC10_2: C10.2 U4.2 | length 7.5
  Top Layer w0.635: U4.2@187.084,119.507 188.976,119.507 189.205,119.736 ; C10.2@188.849,124.917 188.824,124.892 188.824,123.114 189.332,122.606 189.332,119.837
NetC11_2: C11.2 U5.3 XTAL1.1 | length 12.7
  Top Layer w0.254: 174.777,142.548 U5.3@176.346,140.979
  Top Layer w0.305: C11.2@168.333,146.489 170.695,146.489 171.374,147.168 172.822,147.168 XTAL1.1@173.05,146.939 ; XTAL1.1@172.956,146.489 XTAL1.1@173.228,146.761 ; XTAL1.1@173.228,146.812 XTAL1.1@173.228,146.761 ; XTAL1.1@173.253,146.787 XTAL1.1@173.228,146.761 ; 174.854,142.494 173.228,144.12 XTAL1.1@173.228,146.761
NetC12_1: C12.1 U4.6 | length 12.2
  Top Layer w0.635: U4.6@187.084,114.427 188.747,114.427 189.332,113.843 189.332,111.15 190.221,110.261 ; 190.17,110.261 190.221,110.261 ; 190.246,110.236 190.221,110.261 ; C12.1@195.707,110.744 195.301,110.744 194.818,110.261 190.221,110.261
NetC13_2: C13.2 U5.4 XTAL1.2 | length 17.4
  Top Layer w0.254: 170.099,141.6 170.053,141.554 170.065,141.554 171.792,139.827 173.228,139.827 174.612,141.211
  Top Layer w0.305: 170.099,141.6 XTAL1.2@170.099,143.683 ; 174.676,141.224 175.394,141.224 U5.4@175.992,140.626
  Top Layer w0.381: C13.2@163.474,140.208 165.1,140.208 168.707,143.815 XTAL1.2@169.824,143.815
NetC16_1: C16.1 C17.2 U6.14 | length 8.2
  Top Layer w0.254: U6.14@181.173,100.244 181.173,102.052 C17.2@182.143,103.022 ; C17.2@182.143,103.073 C17.2@182.143,103.022 ; C16.1@185.496,99.441 185.496,99.492 182.143,102.845 C17.2@182.143,103.022
NetC17_1: C17.1 R11.1 | length 3.1
  Top Layer w0.381: C17.1@184.563,103.124 187.579,103.124 R11.1@187.655,103.048
NetD1_1: D1.1 R7.1 | length 5.8
  Top Layer w0.508: R7.1@169.136,111.732 170.51,113.106 v1@170.51,113.182
  Bottom Layer w0.508: v1(170.663,113.182) 170.663,113.386 D1.1@173.165,115.887
NetD2_1: D2.1 R12.1 | length 6.4
  Top Layer w0.254: R12.1@183.744,126.721 183.896,126.873 184.556,126.873 ; 184.429,126.873 184.556,126.873 ; v1(186.461,126.873) 184.556,126.873
  Bottom Layer w0.254: D2.1@182.448,126.492 185.953,126.492
NetD2_2: D2.2 U5.31 | length 10.9
  Top Layer w0.254: v1@175.895,124.689 175.895,128.119 U5.31@176.699,128.923
  Bottom Layer w0.254: v1@175.895,124.689 179.705,124.689 180.975,125.959 180.975,126.492 180.924,126.441 D2.2@180.823,126.441
  other v1: 175.946,124.587
NetD3_2: D3.2 H9.2 | length 4.7
  Top Layer w1.016: H9.2@156.192,114.572 158.003,116.383 D3.2@160.096,116.383
NetH10_1: H10.1 U4.7 | length 16.8
  Top Layer w0.381: U4.7@187.084,113.157 186.004,113.157 185.064,112.217 185.064,106.248 185.56,105.753 191.808,105.753 ; 191.757,105.702 191.808,105.753 ; 191.821,105.74 191.808,105.753 ; H10.1@192.024,107.086 192.024,105.969 191.808,105.753
NetH10_3: H10.3 U4.8 | length 4.4
  Top Layer w0.381: H10.3@187.084,107.531 U4.8@187.084,111.887
NetM1_1: M1.1 U1.7 | length 79.4
  Top Layer w0.381: U1.7@211.328,126.836 212.413,126.836 212.956,127.379 212.956,127.887
  Top Layer w0.508: M1.1@177.775,185.875 179.211,185.875 179.603,185.482 179.603,183.54 ; 179.551,181.089 ccw(c180.09,180.55) 179.553,180.01 ; 179.602,182.232 cw(c179.065,181.692) 179.603,181.153 ; 179.609,179.863 cw(c179.072,179.322) 179.611,178.783 ; 179.627,183.401 ccw(c180.166,182.862) 179.629,182.321 ; 179.653,178.747 ccw(c180.214,178.185) 179.654,177.622 ; 179.672,159.799 ccw(c180.211,159.26) 179.674,158.719 ; 179.672,162.161 ccw(c180.211,161.622) 179.674,161.081 ; 179.672,176.359 ccw(c180.211,175.82) 179.674,175.28 ; 179.678,169.253 ccw(c180.217,168.714) 179.68,168.173 ; 179.68,164.567 ccw(c180.218,164.028) 179.681,163.487 ; 179.68,166.903 ccw(c180.218,166.364) 179.681,165.824 ; 179.68,171.628 ccw(c180.218,171.089) 179.681,170.548 ; 179.68,173.965 ccw(c180.218,173.426) 179.681,172.885 ; 179.756,177.571 cw(c179.219,177.031) 179.757,176.492 ; 179.761,160.991 cw(c179.224,160.45) 179.763,159.911 ; 179.78,165.748 cw(c179.243,165.207) 179.781,164.668 ; 179.78,168.085 cw(c179.243,167.544) 179.781,167.005 ; 179.78,172.809 cw(c179.243,172.268) 179.781,171.729 ; 179.78,175.146 cw(c179.243,174.605) 179.781,174.066 ; 179.781,158.633 184.125,158.633 ; 179.781,170.459 cw(c179.244,169.919) 179.783,169.38 ; 179.787,163.353 cw(c179.25,162.812) 179.788,162.273 ; 184.183,158.504 ccw(c219.958,176.35) 192.229,147.549 ; 192.341,147.434 201.851,137.925 ; 202.006,137.82 ccw(c228.39,167.858) 209.669,132.533 ; 209.847,132.41 209.847,128.811 210.185,128.473 212.369,128.473 212.956,127.887
NetM1_2: M1.2 U1.5 | length 84.9
  Top Layer w0.305: U1.5@211.328,125.536 212.903,125.536 213.6,126.234 213.61,126.234 ; v1@214.935,127.559 v1@214.935,127.838
  Top Layer w0.381: 213.61,126.234 v1@214.935,127.559
  Top Layer w0.508: 175.87,178.841 ccw(c176.408,178.302) 175.871,177.762 ; 175.87,181.178 ccw(c176.408,180.639) 175.871,180.099 ; 175.87,182.448 cw(c176.407,182.989) 175.868,183.528 177.711,183.528 M1.2@177.724,183.54 ; 175.964,160.18 ccw(c176.503,159.641) v1@175.966,159.1 ; 175.964,162.542 ccw(c176.503,162.003) 175.966,161.462 ; 175.964,176.74 ccw(c176.503,176.201) 175.966,175.661 ; 175.97,169.634 ccw(c176.508,169.095) 175.971,168.554 ; 175.97,180.023 cw(c175.433,179.482) 175.971,178.943 ; 175.97,182.359 cw(c175.433,181.819) 175.971,181.28 ; 175.971,164.948 ccw(c176.51,164.409) 175.973,163.868 ; 175.971,167.284 ccw(c176.51,166.745) 175.973,166.205 ; 175.971,172.009 ccw(c176.51,171.47) 175.973,170.929 ; 175.971,174.346 ccw(c176.51,173.807) 175.973,173.266 ; 175.977,177.628 cw(c175.44,177.087) 175.978,176.548 ; 176.053,161.372 cw(c175.516,160.831) 176.055,160.292 ; 176.071,166.129 cw(c175.534,165.588) 176.073,165.049 ; 176.071,168.466 cw(c175.534,167.925) 176.073,167.386 ; 176.071,173.19 cw(c175.534,172.649) 176.073,172.11 ; 176.071,175.527 cw(c175.534,174.986) 176.073,174.447 ; 176.073,170.84 cw(c175.536,170.3) 176.074,169.761 ; 176.078,163.734 cw(c175.541,163.193) 176.08,162.654
  Bottom Layer w0.508: 200.279,139.522 201.524,138.278 ; 201.524,137.693 201.651,137.566 ; 213.817,130.226 213.817,128.93 v1@214.973,127.775
  Bottom Layer w0.635: v1@176.352,158.699 183.591,158.699 ; 183.693,158.674 ccw(c219.676,176.097) 191.399,147.835 ; 191.516,147.701 194.932,144.285 ; 194.996,144.247 195.555,144.247 196.774,143.027 196.774,141.402 198.653,139.522 200.279,139.522 ; 201.524,137.693 201.524,138.278 ; 201.65,137.567 ccw(c227.109,166.171) 213.559,130.355
  other v1: 214.757,127.838 176.098,158.725